# EAGLE board CT_schematic (EAGLE 7.6.0)

Size 100 x 80 mm. Coordinates in mm from the lower left corner, seen from the top.
Outline: 0,0 100,0 100,80 0,80 0,0
Copper layers (1*16): Top 0.035mm / dielectric 1.5mm / Bottom 0.035mm
Design rules "default": minimum track width 10mil, minimum drill 24mil, track to track 8mil, track to pad 8mil, pad to pad 8mil, via to via 8mil, smd to smd 8mil, copper to edge 40mil, drill to drill 8mil, minimum pad ring 10mil, minimum via ring 8mil, stop-mask expansion 4mil, vias tented up to drill 0mil, thermal gap 10mil

## Footprints (pad centres in the part's own frame; a part is rotated, then mirrored left to right if it is on the bottom)
C0603 = smd 0.8 x 0.8: 1 -0.762,0; 2 0.762,0
C0402 = smd 0.5 x 0.5: 1 -0.508,0; 2 0.508,0
C0805 = smd 1.2 x 1.3: 1 -1.016,0; 2 1.016,0
C1206 = smd 1.3 x 1.6: 1 -1.524,0; 2 1.524,0
L0603 = smd 0.8 x 0.8: 1 -0.762,0; 2 0.762,0
L0805 = smd 1.2 x 1.3: 1 -1.016,0; 2 1.016,0
R0603 = smd 0.8 x 0.8: 1 -0.762,0; 2 0.762,0
LQFP48 = smd 0.3 x 1.2: 1 -2.75,-4.25; 2 -2.25,-4.25; 3 -1.75,-4.25; 4 -1.25,-4.25; 5 -0.75,-4.25; 6 -0.25,-4.25; 7 0.25,-4.25; 8 0.75,-4.25; 9 1.25,-4.25; 10 1.75,-4.25; 11 2.25,-4.25; 12 2.75,-4.25; 25 2.75,4.25; 26 2.25,4.25; 27 1.75,4.25; 28 1.25,4.25; 29 0.75,4.25; 30 0.25,4.25; 31 -0.25,4.25; 32 -0.75,4.25; 33 -1.25,4.25; 34 -1.75,4.25; 35 -2.25,4.25; 36 -2.75,4.25 | smd 1.2 x 0.3: 13 4.25,-2.75; 14 4.25,-2.25; 15 4.25,-1.75; 16 4.25,-1.25; 17 4.25,-0.75; 18 4.25,-0.25; 19 4.25,0.25; 20 4.25,0.75; 21 4.25,1.25; 22 4.25,1.75; 23 4.25,2.25; 24 4.25,2.75; 37 -4.25,2.75; 38 -4.25,2.25; 39 -4.25,1.75; 40 -4.25,1.25; 41 -4.25,0.75; 42 -4.25,0.25; 43 -4.25,-0.25; 44 -4.25,-0.75; 45 -4.25,-1.25; 46 -4.25,-1.75; 47 -4.25,-2.25; 48 -4.25,-2.75
FCI_10118193-0001LF = smd 0.4 x 1.35: 1 -1.3,2.675; 2 -0.65,2.675; 3 0,2.675; 4 0.65,2.675; 5 1.3,2.675 | smd 1.6 x 1.4: 6 -3.2,2.45; 7 3.2,2.45 | smd 1.9 x 1.9: 8 -1.2,0; 9 1.2,0 | hole 0.5: -3.3,0; 3.3,0
SOT143B = smd 1 x 0.7: 1 -0.75,-1 | smd 0.6 x 0.7: 2 0.95,-1; 3 0.95,1; 4 -0.95,1
ASEK = smd 1.4 x 1: 1 -1.1,-0.8; 2 1.1,-0.8; 3 1.1,0.8; 4 -1.1,0.8
ASFL1 = smd 1.7 x 1.5: 1 -1.27,-1.1; 2 1.27,-1.1; 3 1.27,1.1; 4 -1.27,1.1
TSOT-23-5 = smd 1.3 x 0.62: 1 -1.31,0.95; 2 -1.31,0; 3 -1.31,-0.95; 4 1.31,-0.95; 5 1.31,0.95
DFN8_2X3MC = smd 0.813 x 0.305: 1 -1.398,0.75; 2 -1.398,0.25; 3 -1.398,-0.25; 4 -1.398,-0.75; 5 1.398,-0.75; 6 1.398,-0.25; 7 1.398,0.25; 8 1.398,0.75 | smd 1.753 x 1.549: 9 0,0
JST-2-SMD = smd 1 x 4.6: 1 -1,-3.7; 2 1,-3.7 | smd 1.6 x 3.4: NC1 -3.4,1.5; NC2 3.4,1.5
SON-6 = smd 0.55 x 0.3: 1 -0.355,0.5 | smd 0.52 x 0.3: 2 -0.37,0; 3 -0.37,-0.5; 4 0.37,-0.5; 5 0.37,0; 6 0.37,0.5
SW_4-1437565-2 = smd 1.4 x 2.1: 1 -2.23,4.55; 2 -2.23,-4.55; 3 2.23,4.55; 4 2.23,-4.55
LGM67K-G1J2-24-Z = smd 0.8 x 1.4: A -2,0; C 0,0
NC7SZ125M5X = smd 1.3 x 0.7: 1 -1.3,0.95; 2 -1.3,0; 3 -1.3,-0.95; 4 1.3,-0.95; 5 1.3,0.95
DUMMY_PACKAGE_97 = drill 0.3: 1 0,-1; 2 1.5,-1; 3 3,-1

## Placement (x,y rotation side)
C1  1e-06  [C0603]  -15.24,44.45 0 top  (outside the outline)
C2  1e-07  [C0603]  -19.05,44.45 0 top  (outside the outline)
C3  1e-07  [C0603]  -22.86,44.45 0 top  (outside the outline)
C4  1e-07  [C0603]  -26.67,44.45 0 top  (outside the outline)
C5  4.7e-06  [C0603]  -54.61,39.37 0 top  (outside the outline)
C6  1e-07  [C0603]  -30.48,44.45 0 top  (outside the outline)
C7  1e-07  [C0603]  -34.29,44.45 0 top  (outside the outline)
C8  1e-08  [C0603]  -38.1,44.45 0 top  (outside the outline)
C9  1e-06  [C0603]  -41.91,44.45 0 top  (outside the outline)
C10  1e-08  [C0402]  -26.67,49.53 0 top  (outside the outline)
C11  1e-08  [C0402]  -30.48,49.53 0 top  (outside the outline)
C12  1e-05  [C0805]  -27.94,33.02 0 top  (outside the outline)
C13  1e-05  [C0805]  -33.02,33.02 0 top  (outside the outline)
C14  1e-07  [C0402]  -34.29,49.53 0 top  (outside the outline)
C15  1e-05  [C1206]  -48.26,25.4 0 top  (outside the outline)
C16  1e-05  [C1206]  -16.51,33.02 0 top  (outside the outline)
C17  1e-08  [C0402]  -38.1,49.53 0 top  (outside the outline)
F1  240.0  [L0603]  -45.72,44.45 0 top  (outside the outline)
I1  2.2e-06  [L0805]  -38.1,33.02 0 top  (outside the outline)
R1  10000.0  [R0603]  -30.48,39.37 0 top  (outside the outline)
R2  1000.0  [R0603]  -49.53,44.45 0 top  (outside the outline)
R3  1600.5  [R0603]  -53.34,44.45 0 top  (outside the outline)
R4  4700.0  [R0603]  -15.24,49.53 0 top  (outside the outline)
R5  10000.0  [R0603]  -35.56,39.37 0 top  (outside the outline)
R6  220000.0  [R0603]  -15.24,39.37 0 top  (outside the outline)
R7  1000000.0  [R0603]  -50.8,33.02 0 top  (outside the outline)
R8  10000.0  [R0603]  -40.64,39.37 0 top  (outside the outline)
R9  10000.0  [R0603]  -45.72,39.37 0 top  (outside the outline)
R10  9100.0  [R0603]  -19.05,49.53 0 top  (outside the outline)
R11  680000.0  [R0603]  -20.32,39.37 0 top  (outside the outline)
R12  120000.0  [R0603]  -25.4,39.37 0 top  (outside the outline)
R13  2000.0  [R0603]  -22.86,49.53 0 top  (outside the outline)
R14  10000.0  [R0603]  -50.8,39.37 0 top  (outside the outline)
U1  stm32f072cbt7  [LQFP48]  -22.86,17.78 0 top  (outside the outline)
U2  10118193-0001LF  [FCI_10118193-0001LF]  -50.8,16.51 0 top  (outside the outline)
U3  prtr5v0u2ax  [SOT143B]  -50.8,49.53 0 top  (outside the outline)
U4  ASEK-32.768KHz-ECST  [ASEK]  -29.21,26.67 0 top  (outside the outline)
U5  ASFL1-25MHZ-NCS  [ASFL1]  -41.91,16.51 0 top  (outside the outline)
U6  ltc3406es5  [TSOT-23-5]  -43.18,33.02 0 top  (outside the outline)
U7  MCP73831T-2ACI/MC  [DFN8_2X3MC]  -26.67,53.34 0 top  (outside the outline)
U8  S2B-PH-SM4-TB(LF)(SN)  [JST-2-SMD]  -41.91,6.35 0 top  (outside the outline)
U9  TPS3895ADRYR  [SON-6]  -20.32,53.34 0 top  (outside the outline)
U10  4-1437565-2  [SW_4-1437565-2]  -27.94,6.35 0 top  (outside the outline)
U11  Q65110A2395  [LGM67K-G1J2-24-Z]  -36.83,26.67 0 top  (outside the outline)
U12  nc7sz125m5x  [NC7SZ125M5X]  -21.59,33.02 0 top  (outside the outline)
U13  Dummy  [DUMMY_PACKAGE_97]  -17.78,54.61 0 top  (outside the outline)

## Library data of the parts
C1-C17 F1 I1 R1-R14 U1-U13 = circuit_tree

## Nets
CLK_U1_3: U1.3 U4.3
CLK_U1_5: U1.5 U5.3
GND: C1.2 C2.2 C3.2 C4.2 C5.2 C6.2 C7.2 C8.2 C9.2 C10.2 C11.2 C12.2 C13.1 C13.2 C14.2 C15.2 C16.2 C17.2 R2.2 R5.2 R6.2 R10.2 R12.2 R13.2 U1.8 U1.23 U1.35 U1.47 U2.5 U2.6 U2.7 U2.8 U2.9 U3.1 U4.2 U5.2 U6.2 U7.6 U7.9 U8.2 U9.2 U11.C U12.1 U12.3 U13.1
INPUT_USBPOWER_5V: C15.1 R14.2 U2.1 U3.4 U7.1 U7.2
NET_U1_7: R4.1 U1.7 U12.4
NET_U1_9: C8.1 C9.1 F1.1 U1.9
NET_U1_44: R5.1 U1.44
NET_U1_45: R3.1 U1.45 U11.A
NET_U1_46: R1.1 U1.46 U10.3 U10.4
NET_U6_1: U6.1
NET_U6_3: I1.1 U6.3
NET_U6_5: R6.1 R7.1 U6.5
NET_U6_ATNET_3: I1.2 R7.2
NET_U7_5: R14.1 U7.5
NET_U7_8: R13.1 U7.8
NET_U9_1: R9.1 R10.1 U9.1
NET_U9_3: R11.2 R12.1 U9.3
NET_U9_4: R8.1 U9.4 U12.2
NET_U10_1: R2.1 U10.1 U10.2
PROC_PC13: U1.2 U13.2
PROC_PC15_OSC32_OUT: U1.4 U13.3
PROC_USB_DM: U1.32 U2.2 U3.3
PROC_USB_DP: U1.33 U2.3 U3.2
VCC_S1_3V7: C12.1 C16.1 U6.4 U7.3 U7.4 U8.1
VCC_TIER1_3V3: C1.1 C2.1 C3.1 C4.1 C5.1 C6.1 C7.1 C10.1 C11.1 C13.2 C14.1 C17.1 F1.2 I1.2 R1.2 R3.2 R4.2 R7.2 R8.2 R9.2 R11.1 U1.1 U1.24 U1.36 U1.48 U4.4 U5.4 U9.6 U12.5

## Tracks (layer width: path | path; a pad name or v marks a point on that pad's centre or on a via)
CLK_U1_3  (1 unrouted)
CLK_U1_5  (1 unrouted)
GND  (44 unrouted)
INPUT_USBPOWER_5V  (5 unrouted)
NET_U1_7  (2 unrouted)
NET_U1_9  (3 unrouted)
NET_U1_44  (1 unrouted)
NET_U1_45  (2 unrouted)
NET_U1_46  (3 unrouted)
NET_U6_3  (1 unrouted)
NET_U6_5  (2 unrouted)
NET_U6_ATNET_3  (1 unrouted)
NET_U7_5  (1 unrouted)
NET_U7_8  (1 unrouted)
NET_U9_1  (2 unrouted)
NET_U9_3  (2 unrouted)
NET_U9_4  (2 unrouted)
NET_U10_1  (2 unrouted)
PROC_PC13  (1 unrouted)
PROC_PC15_OSC32_OUT  (1 unrouted)
PROC_USB_DM  (2 unrouted)
PROC_USB_DP  (2 unrouted)
VCC_S1_3V7  (5 unrouted)
VCC_TIER1_3V3  (28 unrouted)